# Altium PCB Mach dieu khien tu xa unroute.PcbDoc
Units mm, origin at the board's own origin, x right, y up, seen from the top; angles counter-clockwise.
Board outline 143 x 70 mm, 2 copper layers (Top Layer, Bottom Layer); 72 components, 54 nets, 222 pads, 0 vias.
Unrouted connection lines stored in the file: 167.
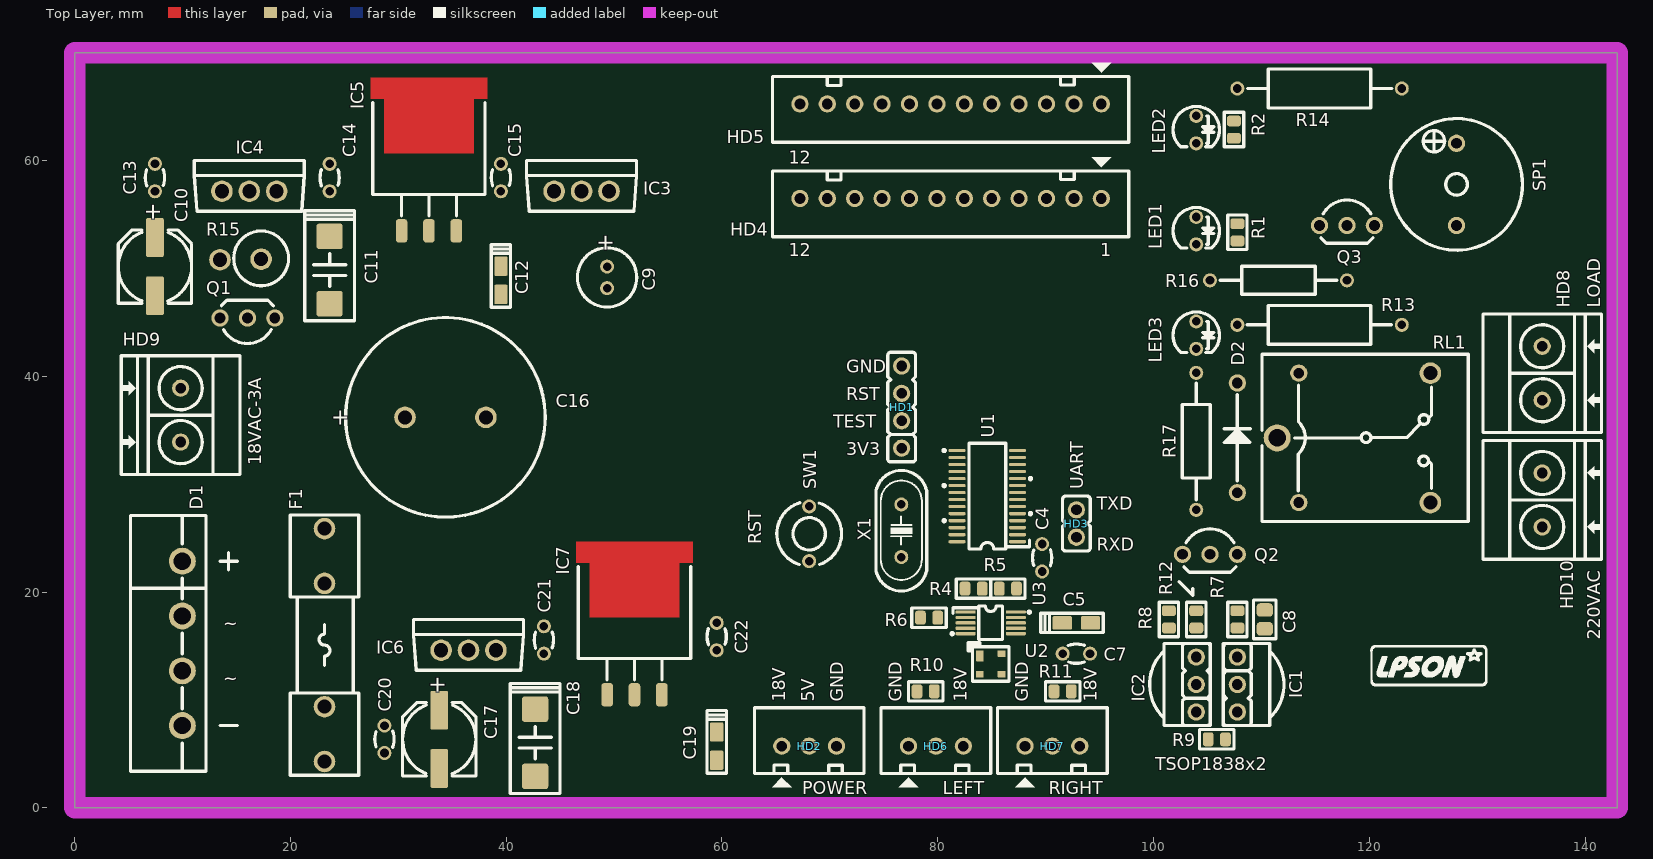
[diagram p0: Top Layer view]
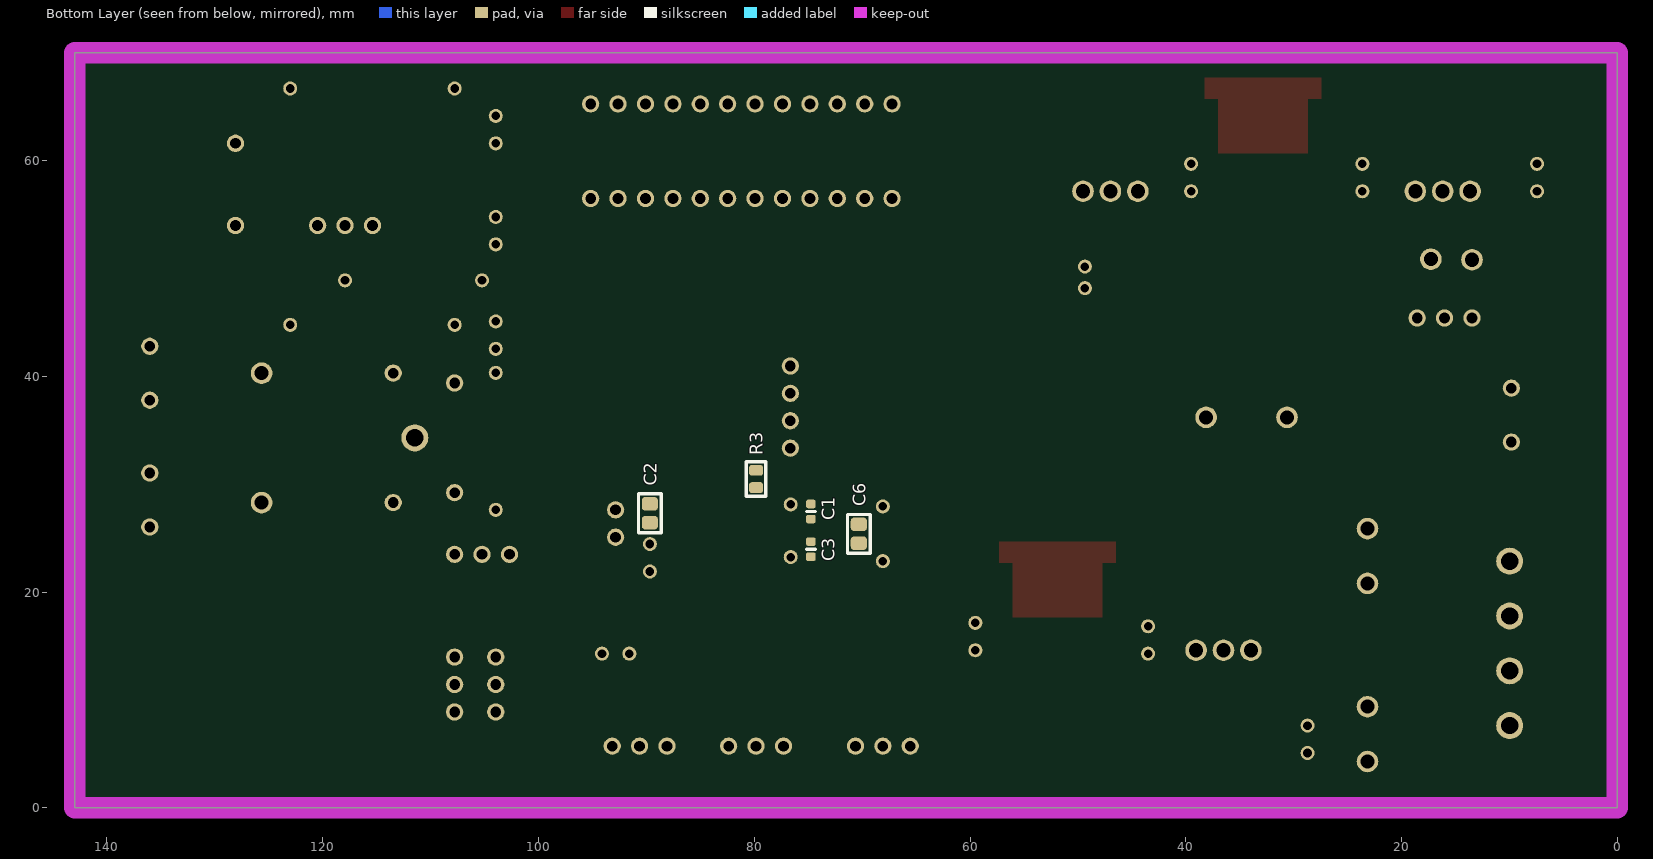
[diagram p1: Bottom Layer view, seen from below]

## Layer stack, top to bottom
Top Solder: solder mask 0.0102, Solder Resist, Dk 3.5
Top Layer: signal copper 0.0356
Dielectric1: dielectric 0.32, FR-4, Dk 4.8
Bottom Layer: signal copper 0.0356
Bottom Solder: solder mask 0.0102, Solder Resist, Dk 3.5

## Board outline
0,0 0,70 143,70 143,0

## Design rules (kind name [scope] priority, off if disabled: settings)
Clearance "Stitching GND" [IsStitchingVia and InNet('GND') vs (IsVia and (Not IsStitchingVia)) Or IsPad] p1: gap=0.5 ignorepadtopadclearanceinfootprint=FALSE except(0: Arc-Hole Track-Hole SMDPad-Hole THPad-Hole Via-Hole Fill-Hole Poly-Hole Region-Hole Text-Hole)
Clearance [All] p2: gap=0.5 ignorepadtopadclearanceinfootprint=FALSE except(0: Arc-Hole Track-Hole SMDPad-Hole THPad-Hole Via-Hole Fill-Hole Poly-Hole Region-Hole Text-Hole)
PlaneConnect [All] p1: planeconnectstyle=Relief reliefexpansion=0.5 reliefentries=4 reliefconductorwidth=0.5 reliefairgap=0.5
PolygonConnect PolygonConnect_1 [isvia] p1: connectstyle=Direct reliefconductorwidth=0.254 reliefentries=4 polygonreliefangle="90 Angle" airgapwidth=0.254
PolygonConnect [All] p2: connectstyle=Relief reliefconductorwidth=1 reliefentries=4 polygonreliefangle="90 Angle" airgapwidth=0.5
RoutingVias [All] p1: holewidth=0.3 width=0.7 viastyle="Through Hole" minholewidth=0.3 minwidth=0.7 maxholewidth=0.6 maxwidth=1.1
SolderMaskExpansion [All] p1: expansion=0.102 istentingtop=FALSE
Width [All] p1: maxlimit=3 minlimit=0.3 preferedwidth=0.5
29 further rules are at their usual default settings.

## Components (designator, comment, footprint, x,y, rotation, side; value= is the part's Value field where it differs from the comment)
C1 "22pF" C0603 74.755,27.464 r90 bottom
C2 "10uF/16V" C0805 89.677,27.305 r90 bottom
C3 "22pF" C0603 74.755,23.971 r270 bottom
C4 "100nF/16V" "Tu gom 104" 89.677,23.178 r90 top
C5 "10uF/16V" CAP_TANTA_10UF_16V 92.852,17.145 r0 top
C6 "1nF" C0805 70.31,25.4 r90 bottom
C7 "100nF/16V" "Tu gom 104" 92.852,14.287 r180 top
C8 "Cap Pol1" C0805 110.315,17.462 r90 top
C9 "10uF/16V" CAP_10UF_16V 49.355,50.165 r270 top
C10 "10uF/50V" C_FC_10UF_50V 7.445,50.165 r270 top
C11 "10uF/35V" CAP_TANTA_10UF_35V 23.637,49.848 r270 top
C12 "10uF/16V" CAP_TANTA_10UF_16V 39.512,48.895 r270 top
C13 "100nF/50V" "Tu gom 104" 7.445,58.42 r270 top
C14 "100nF/25V" "Tu gom 104" 23.637,58.42 r270 top
C15 "100nF/16V" "Tu gom 104" 39.512,58.42 r270 top
C16 "3300uF/50V" CAP_3300UF_50V 30.622,36.195 r0 top
C17 "10uF/50V" C_FC_10UF_50V 33.797,6.35 r270 top
C18 "10uF/35V" CAP_TANTA_10UF_35V 42.687,6.032 r270 top
C19 "10uF/16V" CAP_TANTA_10UF_16V 59.515,5.715 r270 top
C20 "100nF/50V" "Tu gom 104" 28.717,6.35 r90 top
C21 "100nF/25V" "Tu gom 104" 43.498,15.557 r270 top
C22 "100nF/16V" "Tu gom 104" 59.515,15.875 r270 top
D1 "KBU1010" KBU1010G 9.985,15.24 r270 top
D2 "1N4007" 1N4007 107.775,34.29 r90 top
F1 "Fuse/2.5A" FUSE2_5A 23.165,15.085 r90 top
HD1 "SpyBiWire" Header_4 76.66,37.148 r90 top
HD2 "Power" CON3 68.087,5.715 r0 top
HD3 "UART" Header_2 92.852,26.353 r90 top
HD4 "Display Port 1" CON12 81.197,56.487 r180 top
HD5 "Display Port 2" CON12 81.197,65.25 r180 top
HD6 "UM-18 LEFT" CON3 79.835,5.715 r0 top
HD7 "UM-18 RIGHT" CON3 90.63,5.715 r0 top
HD8 "Domino" DOMINO2_GREEN 136.032,37.783 r90 top
HD9 "18VAC-3A" DOMINO2_GREEN 9.83,38.897 r270 top
HD10 "220VAC" DOMINO2_GREEN 136.032,26.035 r90 top
IC1 "TSOP1838" TSOP1838 107.775,11.43 r90 top
IC2 "TSOP1838" TSOP1838 103.965,11.43 r270 top
IC3 "LM7805" LM7805 46.99,57.15 r0 top
IC4 "LM7812" LM7805 16.192,57.15 r0 top
IC5 "LM1086 (3.3V)" LM1086 32.845,53.482 r270 top
IC6 "LM7818" LM7805 36.513,14.605 r0 top
IC7 "LM1086 (3.3V)" LM1086 51.895,10.477 r270 top
LED1 "RED" LED3R 103.965,54.769 r270 top
LED2 "GREEN" LED3R 103.965,64.135 r270 top
LED3 "LED" LED3R 103.965,45.085 r270 top
Q1 "KSA1013" KSA1013 16.017,45.403 r180 top
Q2 "2N2222" 2N2222 105.235,23.495 r0 top
Q3 "2N2222" 2N2222 117.935,53.975 r0 top
R1 "Res2" RESC2012(0805) 107.775,53.34 r270 top
R2 "Res2" RESC2012(0805) 107.457,62.865 r270 top
R3 "Res2" RESC2012(0805) 79.835,30.48 r90 bottom
R4 "Res2" RESC2012(0805) 83.327,20.32 r180 top
R5 "Res2" RESC2012(0805) 86.502,20.32 r0 top
R6 "Res2" RESC2012(0805) 79.2,17.621 r180 top
R7 "Res2" RESC2012(0805) 107.775,17.462 r90 top
R8 "Res2" RESC2012(0805) 101.425,17.462 r270 top
R9 "Res2" RESC2012(0805) 105.87,6.35 r180 top
R10 "Resistor 1/4W" RESC2012(0805) 78.882,10.795 r180 top
R11 "Resistor 1/4W" RESC2012(0805) 91.582,10.795 r0 top
R12 "Res2" RESC2012(0805) 103.965,17.462 r90 top
R13 "Res2" CFR1WS 115.395,44.768 r180 top
R14 "Res2" CFR1WS 115.395,66.675 r0 top
R15 "Res2" R2WD 13.477,50.8 r0 top
R16 "Res2" "RES 1/4W CFR25" 105.235,48.895 r0 top
R17 "Res2" "RES 1/4W CFR25" 103.965,27.623 r90 top
RL1 "Relay 10A/5V" RL_10A_5V 118.57,34.29 r0 top
SP1 "Speaker" SPEAKER 128.095,61.595 r270 top
SW1 "RESET" "BUTTON 2PIN TRON" 68.087,27.94 r270 top
U1 "MSP430G2553" MSP430G2253IPW28R 84.597,28.893 r90 top
U2 "ADS1115" ADS1115 84.915,17.145 r270 top
U3 "PRTR5V0U2X" PRTR5V0U2X 84.915,13.335 r270 top
X1 "12Mhz" CRYSTAL 76.625,25.682 r270 top

## Footprints (in the part's own frame and the unit in brackets; to place one, negate y for a bottom-side part, rotate by r counter-clockwise, add the part's x,y. Pads: shape width x height; smd on the part's side, far side on the other; paste and mask are expansions set on the pad)
1N4007 [mm] "DIODE_DIP"
  round 1.6 hole 1 mask+0.1: 1(-5.08,0) 2(5.08,0)
  silkscreen extent -4,-1.2 4,1.21, body extent -5.8,-1.25 5.8,1.25, height 2.75
2N2222 [mm] "TO-92 Bent Lead, Flat Index; 3 In-Line, Axial Leads; Body Dia. 4.5mm; Leads 0.51 x 0.48 mm (max)"
  round 1.6 hole 1 mask+0.1: 1(-2.54,0) 2(0,0)
  round 1.6 hole 1: 3(2.54,0)
  silkscreen extent -2.41,-1.65 2.41,2.37, body extent -2.79,-1.59 2.79,2.61, height 10
ADS1115 [mm] "MSOP-10, 16-Bit  Analog-to-Digital"
  rrect50% 0.3x1.85 smd mask+0.05: 1(-1,-2.325) 2(-0.5,-2.325) 3(0,-2.325) 4(0.5,-2.325) 5(1,-2.325) 6(1,2.325) 7(0.5,2.325) 8(0,2.325) 9(-0.5,2.325) 10(-1,2.325)
  silkscreen extent -1.55,-3.67 1.55,3.68, body extent -1.5,-2.45 1.5,2.45, height 1.15
"BUTTON 2PIN TRON" [mm] "PIN TO PIN 5.08, W=6MM"
  round 1.3 hole 0.8: 1(0,0) 2(5.08,0)
  silkscreen extent -0.33,-3 5.4,3
C0603 [mm] "Chip Capacitor, Body 1.6x0.8mm, 1608"
  rrect50% 0.8x0.9 smd: 1(-0.7,0) 2(0.7,0)
  silkscreen extent 0,-0.4 0,0.4, body extent -0.8,-0.4 0.8,0.4, height 0.6
C0805 [mm] "Chip Capacitor, 2-Leads, Body 2.0x1.3mm, IPC Medium Density"
  rrect50% 1.25x1.5 smd: 1(-0.875,0) 2(0.875,0)
  silkscreen extent -1.8,-1.05 1.8,1.05, body extent -1,-0.6 1,0.6, height 0.95
C_FC_10UF_50V [mm] "ALUMINUM CAPACITOR 6.8x6.8x5.5mm"
  rrect20% 3.6x1.65 smd mask+0.1: 1(-2.7,0) 2(2.7,0)
  silkscreen extent -3.4,-3.4 3.4,3.4, body extent -3.65,-3.3 3.65,3.3, height 7.7
CAP_10UF_16V [mm] "Capacitor, Electrolytic, Radial; Body 5 x 11 mm (Dia.xH typ); Pin Spacing 2 mm (typ)"
  round 1.3 hole 0.8: 1(0,0) 2(2,0)
  silkscreen extent -1.75,-2.75 3.75,2.75, body extent -1.53,-2.53 3.53,2.53, height 11.53
CAP_3300UF_50V [mm] "Capacitor, Electrolytic, Radial; Body 18 x 35.5 mm (Dia.xH typ); Pin Spacing 7.5 mm (typ)"
  round 2 hole 1.3: 1(0,0) 2(7.5,0)
  silkscreen extent -5.5,-9.25 13,9.25
CAP_TANTA_10UF_16V [mm] "CAP TANTALUM 10UF 16V 10% C1206(3216), Body 3.2x1.6mm"
  rrect20% 1.8x1.23 smd: 1(-1.31,0) 2(1.31,0)
  silkscreen extent -3.3,-0.9 2.5,0.9, body extent -1.6,-0.8 1.6,0.8, height 1
CAP_TANTA_10UF_35V [mm] "CAP TANTALUM 10UF 35V 10% C2917(7343), Body 7.3x4.3mm"
  rrect20% 2.37x2.43 smd: 1(-3.12,0) 2(3.12,0)
  silkscreen extent -5.5,-2.3 4.7,2.3, body extent -3.8,-2.3 3.8,2.3, height 3.1
CFR1WS [mm] "RESISTOR_1W"
  round 1.3 hole 0.8: 1(-7.62,0) 2(7.62,0)
  silkscreen extent -6.68,-1.8 6.7,1.8
CON3 [mm] "CON 3"
  round 1.6 hole 1 mask+0.1: 1(-2.54,0) 2(0,0) 3(2.54,0)
  silkscreen extent -5.08,-3.8 5.08,3.56, body extent -5,-2.29 5,3.41, height 7
CON12 [mm] "CON12"
  round 1.6 hole 1 mask+0.1: 1(-13.97,0) 2(-11.43,0) 3(-8.89,0) 4(-6.35,0) 5(-3.81,0) 6(-1.27,0) 7(1.27,0) 8(3.81,0) 9(6.35,0) 10(8.89,0) 11(11.43,0) 12(13.97,0)
  silkscreen extent -16.51,-3.8 16.51,3.56, body extent -16.3,-2.29 16.3,3.41, height 7
CRYSTAL [mm] "Quartz Crystal, Thru-Hole; 2 Leads; Body 11.35 x 4.65 x 13.46 mm (LxWxH max)"
  round 1.3 hole 0.8 mask+0.1: 1(-2.44,0) 2(2.44,0)
  silkscreen extent -5.59,-2.35 5.59,2.35, body extent -5.49,-2.25 5.49,2.25, height 3.6
DOMINO2_GREEN [mm] "10A PIN TO PIN 5mm 11mmx11mm"
  round 1.6 hole 1 mask+0.1: 1(0,0) 2(5,0)
  silkscreen extent -3,-5.5 8,5.5, body extent -3.14,-4.05 7.62,4.95, height 12.5
FUSE2_5A [mm] "Fuse 2.5A  250V"
  round 2 hole 1.3: 1(-10.795,0) 1(-5.715,0) 2(5.715,0) 2(10.795,0)
  silkscreen extent -12.06,-3.18 12.06,3.18, body extent -11.3,-3.09 11.4,3.1, height 9.6
Header_2 [mm] "Connector DIP, 2Pin_2.54mm"
  round 1.6 hole 1 mask+0.1: 1(-1.27,0) 2(1.27,0)
  silkscreen extent -2.54,-1.28 2.54,1.28, body extent -2.54,-1.27 2.54,1.27, height 10.1
Header_4 [mm] "Connector DIP, 4Pin_2.54mm"
  round 1.6 hole 1 mask+0.1: 1(-3.81,0) 2(-1.27,0) 3(1.27,0) 4(3.81,0)
  silkscreen extent -5.08,-1.28 5.08,1.28, body extent -5.08,-1.27 5.08,1.27, height 10.1
KBU1010G [mm] "KBP206 bridge diode 10A"
  round 2.5 hole 1.6 mask+0.1: 1(-7.62,0) 2(-2.54,0) 3(2.54,0) 4(7.62,0)
  silkscreen extent -11.85,-4.8 11.85,2.2, body extent -11.6,-4.75 11.6,2.2, height 18.65
KSA1013 [mm] "TO-92 Bent Lead, Flat Index; 3 In-Line, Axial Leads; Body Dia. 4.5mm; Leads 0.51 x 0.48 mm (max)"
  round 1.6 hole 1 mask+0.1: 1(-2.54,0) 2(0,0)
  round 1.6 hole 1: 3(2.54,0)
  silkscreen extent -2.41,-1.65 2.41,2.37, body extent -2.79,-1.59 2.79,2.61, height 10
LED3R [mm] "LED 3mm_RED"
  round 1.3 hole 0.8: 1(0,0) 2(2.54,0)
  silkscreen extent -0.88,-2.15 2.87,2.15, body extent -0.73,-2 2.94,2, height 4.6
LM1086 [mm] "TO-263 1.5A Low Dropout Positive Regulators"
  rrect50% 2.16x1.07 smd mask+0.1: 1(0,-2.54) 2(0,0) 3(0,2.54)
  Top Layer region: -14.17,-5.4 -14.17,5.4 -12.26,5.4 -12.26,4.165 -7.18,4.165 -7.18,-4.165 -12.26,-4.165 -12.26,-5.4
  silkscreen extent -11.88,-5.21 -1.4,5.21, body extent -14.52,-5 1.15,5, height 4.78
LM7805 [mm] "POWER IC 7805"
  round 2 hole 1.3: 1(-2.54,0) 2(0,0) 3(2.54,0)
  silkscreen extent -5.1,-1.85 5.1,2.85, body extent -5.56,-1.63 5.65,3.06, height 19.17
MSP430G2253IPW28R [mm] "TSSOP PW 28  PIN TO PIN 0.65"
  oval 0.3x1.6 smd mask+0.1: 1(-4.225,-2.8) 2(-3.575,-2.8) 3(-2.925,-2.8) 4(-2.275,-2.8) 5(-1.625,-2.8) 6(-0.975,-2.8) 7(-0.325,-2.8) 8(0.325,-2.8) 9(0.975,-2.8) 10(1.625,-2.8) 11(2.275,-2.8) 12(2.925,-2.8) 13(3.575,-2.8) 14(4.225,-2.8) 15(4.225,2.8) 16(3.575,2.8) 17(2.925,2.8) 18(2.275,2.8) 19(1.625,2.8) 20(0.975,2.8) 21(0.325,2.8) 22(-0.325,2.8) 23(-0.975,2.8) 24(-1.625,2.8) 25(-2.275,2.8) 26(-2.925,2.8) 27(-3.575,2.8) 28(-4.225,2.8)
  silkscreen extent -4.9,-4.1 4.9,4.1, body extent -4.9,-3.31 4.9,3.31, height 1.2
PRTR5V0U2X [mm] "SOT143B Ultra low capacitance double rail-to-rail ESD protection diode"
  rrect10% 1x0.7 smd mask+0.1: 1(-0.75,-1)
  rrect10% 0.6x0.7 smd mask+0.1: 2(0.95,-1) 3(0.95,1) 4(-0.95,1)
  silkscreen extent -2,-2.1 1.6,1.7
R2WD [mm] "R2W, 2 pin 3.81mm stand"
  round 2 hole 1.3: 1(0,0) 2(3.81,0.051)
  silkscreen extent 1.27,-2.41 6.35,2.66
"RES 1/4W CFR25" [mm] "Axial Device, Thru-Hole; 2 Leads fi 0.55"
  round 1.3 hole 0.8 mask+0.1: 1(0,0) 2(12.7,0)
  silkscreen extent 0.94,-1.3 11.76,1.3, body extent 0.97,-1.16 11.74,1.16, height 2.93
RESC2012(0805) [mm] "Chip Resistor, Body 2.0x1.3mm, 1/8W 0805"
  rrect50% 1x1.3 smd: 1(-0.8,0) 2(0.8,0)
  silkscreen extent -1.6,-0.9 1.6,0.9, body extent -1,-0.62 1,0.63, height 0.6
RL_10A_5V [mm] "Relay SRD-05VDC-SL-C, 5 pin, 10A,19.1X15.5"
  round 2.5 hole 1.6: 1(-7.1,0)
  round 2 hole 1.3: 2(7.1,6) 3(7.1,-6)
  round 1.6 hole 1: 4(-5.1,-6) 5(-5.1,6)
  silkscreen extent -8.5,-7.75 10.6,7.75, body extent -8.5,-7.75 10.6,7.75, height 15.3
SPEAKER [mm] "TMB12A05"
  round 1.6 hole 1 mask+0.1: 1(0,0) 2(7.62,0)
  silkscreen extent -2.29,-6.1 9.91,6.1
TSOP1838 [mm] "Connector DIP, 3Pin_2.54mm"
  round 1.6 hole 1 mask+0.1: 1(2.54,0) 2(0,0) 3(-2.54,0)
  silkscreen extent -3.81,-4.32 3.81,1.3
"Tu gom 104" [mm] "Capacitor, Radial, Tantalum, Non-Polarised; Body 3.05 x 1.78 x 3.43 mm (WxTxH max); Pin Spacing 2.54 mm (typ)"
  round 1.3 hole 0.8: 1(-1.27,0) 2(1.27,0)
  silkscreen extent -0.73,-0.89 0.76,0.89, body extent -2.92,-0.85 2.92,0.85, height 6.42

## Part data
C1 C3: library part CN1, "0805-SMD Capacitor"
C2 C16: library part CP1, "Cap P  0,1uF < 22uF , 16 - 50V"
C4 C6 C7 C13 C14 C15 C20 C21 C22: library part CN2, "Cap np 104 => 105pF"
C5 C11 C12 C18 C19: library part CP1, "Tantalum Capacitor"
C8: "Polarized Capacitor (Radial)"
C9 C10 C17: library part CP1, "Aluminium Capacitor"
D1: "10A glass passivated bridge rectifier"
D2: library part D1A, "Diode 1A"
F1: library part Fuse, "Fuse"
HD1: library part Hed4, "Header 4 (Green)"
HD2 HD6 HD7: library part Hed3, "Header 3 (Green)"
HD3 HD8 HD9 HD10: library part Hed2, "Header 2 (Green)"
HD4 HD5: library part Hed12, "Header 12"
IC3 IC4 IC5 IC6 IC7: library part LM78xx, "Linear Regulator"
LED1 LED2: library part LED, "LED Single colour Green and Red"
LED3: "LED Single colour Green and Red"
Q1: library part A1015, "PNP 600mW, ECB"
Q2 Q3: library part C1815, "TRANS GP SS NPN LP 40V TO92"
R1 R2 R3 R4 R5 R6 R7 R8 R9 R12 R13 R14 R15 R16 R17: "Resistor"
R10 R11: library part Res2
RL1: library part "Relay 1", "Relay SPDT,10A - 12VDC 5 Pin"
SP1: library part SPK, "Speaker Chip"
SW1: library part SW2, "Switch button 2 pin"
U1: "MSP430G2553 (28 pins)"
U2: "Analog to Digital Converter"
U3: "ESD protection diode"
X1: library part XT2, "Crystal For all Crystal 2pin."

## Nets (pads, with @x,y where several pads share a name; then routed paths per layer and width w, separated by ;. In a path a pad name is that pad's centre, name@x,y a point inside that pad or via, vN(x,y) a via of type N, cw(c..) or ccw(c..) an arc to the next point about the centre after c; other vN are vias at no path point)
3.3VA: C5.1 C7.2 C19.1 C22.2 IC7.3 R4.2 R5.2 R6.2 U2.8 U3.4
3V3: C2.1 C4.2 C12.1 C15.2 HD1.1 IC5.3 R3.2 R7.2 R8.2 U1.1
5V: C9.1 HD2.2 IC3.3
12V: C11.1 C14.2 HD4.1 HD5.1 IC4.3 IC5.1 Q1.2 R13.1 R14.1
18V: C18.1 C21.2 HD2.1 HD6.3 HD7.3 IC6.3 IC7.1
26VDC: C16.1 C17.1 C20.2 F1.2 IC3.1 IC6.1 Q1.1 R15.2
AIN0: HD6.2 R10.1 U2.4 U3.2
AIN2: HD7.2 R11.1 U2.6 U3.3
ALERT: R6.1 U1.10 U2.2
BUZZ: R16.1 U1.6
GND: C1.1 C2.2 C3.1 C4.1 C5.2 C6.1 C7.1 C8.2 C9.2 C10.2 C11.2 C12.2 C13.1 C14.1 C15.1 C16.2 C17.2 C18.2 C19.2 C20.1 C21.1 C22.1 D1.4 HD1.4 HD2.3 HD4.12 HD5.12 HD6.1 HD7.1 IC1.2 IC2.2 IC3.2 IC4.2 IC5.2 IC6.2 IC7.2 Q2.1 Q3.1 R1.1 R2.1 R10.2 R11.2 SW1.2 U1.28 U2.1 U2.3 U2.5 U2.7 U3.1
IREMOTE: R8.1 R9.2 R12.2 U1.5
LEDA1: HD4.2 U1.11
LEDA2: HD4.3 U1.12
LEDB1: HD5.2 U1.16
LEDB2: HD5.3 U1.17
NetC8_1: C8.1 IC1.1 IC2.1 R7.1
NetC10_1: C10.1 C13.2 IC4.1 Q1.3 R15.1
NetD1_1: D1.1 F1.1
NetD1_2: D1.2 HD9.1
NetD1_3: D1.3 HD9.2
NetD2_1: D2.1 Q2.3 RL1.4
NetD2_2: D2.2 R13.2 RL1.5
NetHD8_1: HD8.1 HD10.2
NetHD8_2: HD8.2 RL1.1
NetHD10_1: HD10.1 RL1.3
NetIC1_3: IC1.3 R9.1
NetIC2_3: IC2.3 R12.1
NetLED1_2: LED1.2 R1.2
NetLED2_2: LED2.2 R2.2
NetLED3_2: LED3.2 R17.2
NetQ2_2: Q2.2 R17.1
NetQ3_2: Q3.2 R16.2
NetQ3_3: Q3.3 SP1.2
NetR4_1: R4.1 U1.23 U2.9
NetR5_1: R5.1 U1.22 U2.10
NetR14_2: R14.2 SP1.1
P1.5: LED1.1 U1.7
P2.5: LED2.1 U1.18
RELAY: LED3.1 U1.2
RESET: C6.2 HD1.3 R3.1 SW1.1 U1.24
RXD: HD3.1 U1.3
SEG_A: HD4.4 HD5.4 U1.9
SEG_B: HD4.5 HD5.5 U1.8
SEG_C: HD4.6 HD5.6 U1.13
SEG_D: HD4.7 HD5.7 U1.14
SEG_E: HD4.8 HD5.8 U1.15
SEG_F: HD4.9 HD5.9 U1.19
SEG_G: HD4.10 HD5.10 U1.20
SEG_H: HD4.11 HD5.11 U1.21
TEST: HD1.2 U1.25
TXD: HD3.2 U1.4
XIN: C3.2 U1.27 X1.2
XOUT: C1.2 U1.26 X1.1
pads on no net: RL1.2

## Keep-outs
Keep-Out Layer:
  the board outline again, w2

## Silkscreen, mask and mechanical layers (free items; w line width, h text height)
Top Overlay:
  drawing of 897 lines, arcs and shapes, not listed
  text "12" at 66.182,59.69 h1.2
  text "12" at 66.182,51.118 h1.2
  text "1" at 95.075,51.118 h1.2
  text "LOAD" at 141.43,46.355 h1.2 r90
  text "GND" at 71.51,40.323 h1.2
  text "RST" at 71.51,37.783 h1.2
  text "TEST" at 70.31,35.243 h1.2
  text "3V3" at 71.51,32.703 h1.2
  text "18VAC-3A" at 17.287,31.75 h1.2 r90
  text "UART" at 93.487,29.528 h1.2 r90
  text "TXD" at 94.757,27.623 h1.2
  text "RST" at 63.642,24.448 h1.2 r90
  text "RXD" at 94.757,23.813 h1.2
  text "~" at 13.795,16.51 h1.2
  text "220VAC" at 141.43,15.557 h1.2 r90
  text "~" at 13.795,11.43 h1.2
  text "18V" at 65.865,9.842 h1.2 r90
  text "5V" at 68.564,9.842 h1.2 r90
  text "GND" at 71.262,9.842 h1.2 r90
  text "GND" at 76.66,9.842 h1.2 r90
  text "18V" at 82.692,9.842 h1.2 r90
  text "GND" at 88.407,9.842 h1.2 r90
  text "18V" at 94.757,9.842 h1.2 r90
  text "TSOP1838x2" at 100.155,3.492 h1.2
  text "POWER" at 67.452,1.27 h1.2
  text "LEFT" at 80.47,1.27 h1.2
  text "RIGHT" at 90.312,1.27 h1.2

## Dimensions
0,0 to 143,0 on Mechanical 2
0,0 to 0,70 on Mechanical 2

## Text inside footprints (layer, text, board x,y; h text height)
C9: Top Overlay "+" at 48.593,53.229 h1.5 r270; Mechanical 1 "+" at 48.855,51.665 h1 r270; Mechanical 1 "1" at 48.855,50.365 h1 r270; Mechanical 1 "2" at 48.855,48.465 h1 r270
C10: Top Overlay "+" at 6.645,56.065 h1.5 r270; Mechanical 1 "+" at 6.445,53.365 h2 r270
C16: Top Overlay "+" at 23.773,35.495 h1.5; Mechanical 1 "2" at 37.822,35.595 h1.2; Mechanical 1 "1" at 30.422,35.595 h1.2; Mechanical 1 "+" at 26.872,35.495 h1.5
C17: Top Overlay "+" at 32.997,12.25 h1.5 r270; Mechanical 1 "+" at 32.797,9.55 h2 r270
D1: Mechanical 1 "1" at 9.485,22.96 h1 r270; Mechanical 1 "4" at 9.485,7.96 h1 r270; Mechanical 1 "-" at 7.585,7.76 h1 r270; Mechanical 1 "AC" at 7.485,13.46 h1 r270; Mechanical 1 "AC" at 7.485,18.56 h1 r270; Mechanical 1 "+" at 7.585,23.16 h1 r270
HD1: Mechanical 1 "4" at 76.914,40.704 h1.2 r90; Mechanical 1 "1" at 76.914,33.084 h1.2 r90
HD2: Mechanical 1 "3" at 70.287,5.215 h1; Mechanical 1 "1" at 65.387,5.215 h1
HD3: Mechanical 1 "1" at 93.106,24.829 h1.2 r90; Mechanical 1 "2" at 93.106,27.369 h1.2 r90
HD4: Mechanical 1 "1" at 95.296,56.987 h1 r180; Mechanical 1 "12" at 67.997,56.987 h1 r180
HD5: Mechanical 1 "1" at 95.296,65.75 h1 r180; Mechanical 1 "12" at 67.997,65.75 h1 r180
HD6: Mechanical 1 "3" at 82.035,5.215 h1; Mechanical 1 "1" at 77.135,5.215 h1
HD7: Mechanical 1 "3" at 92.83,5.215 h1; Mechanical 1 "1" at 87.93,5.215 h1
IC1: Mechanical 1 "GND" at 111.975,11.93 h1 r180; Mechanical 1 "VCC" at 110.475,12.33 h1 r90; Mechanical 1 "OUT" at 110.475,7.93 h1 r90; Mechanical 1 "3" at 108.029,8.636 h1.2 r90; Mechanical 1 "1" at 108.029,13.716 h1.2 r90
IC2: Mechanical 1 "GND" at 99.765,10.93 h1; Mechanical 1 "VCC" at 101.265,10.53 h1 r270; Mechanical 1 "OUT" at 101.265,14.93 h1 r270; Mechanical 1 "3" at 103.711,14.224 h1.2 r270; Mechanical 1 "1" at 103.711,9.144 h1.2 r270
IC3: Mechanical 1 "O" at 49.149,58.674 h1.2; Mechanical 1 "G" at 46.609,58.674 h1.2; Mechanical 1 "I" at 44.323,58.674 h1.2
IC4: Mechanical 1 "O" at 18.351,58.674 h1.2; Mechanical 1 "G" at 15.811,58.674 h1.2; Mechanical 1 "I" at 13.525,58.674 h1.2
IC5: Mechanical 1 "1" at 30.145,57.157 h1; Mechanical 1 "2" at 32.445,57.157 h1; Mechanical 1 "3" at 35.045,57.057 h1
IC6: Mechanical 1 "O" at 38.672,16.129 h1.2; Mechanical 1 "G" at 36.132,16.129 h1.2; Mechanical 1 "I" at 33.846,16.129 h1.2
IC7: Mechanical 1 "1" at 49.195,14.152 h1; Mechanical 1 "2" at 51.495,14.152 h1; Mechanical 1 "3" at 54.095,14.052 h1
Q1: Mechanical 1 "E" at 18.811,45.784 h0.8 r180; Mechanical 1 "C" at 16.271,45.784 h0.8 r180; Mechanical 1 "B" at 13.731,45.784 h0.8 r180
Q2: Mechanical 1 "C" at 107.635,23.095 h0.8; Mechanical 1 "E" at 102.435,23.095 h0.8; Mechanical 1 "B" at 105.035,23.095 h0.8
Q3: Mechanical 1 "C" at 120.335,53.575 h0.8; Mechanical 1 "E" at 115.135,53.575 h0.8; Mechanical 1 "B" at 117.735,53.575 h0.8
RL1: Mechanical 1 "3" at 125.27,27.59 h1.2; Mechanical 1 "2" at 125.27,39.69 h1.2; Mechanical 1 "4" at 113.07,27.69 h1.2; Mechanical 1 "5" at 113.17,39.79 h1.2; Mechanical 1 "1" at 111.27,33.69 h1.2
SP1: Mechanical 1 "1" at 127.595,61.795 h1.2 r270; Mechanical 1 "2" at 127.495,54.275 h1.2 r270
U1: Mechanical 1 "28" at 83.697,24.392 h1 r90; Mechanical 1 "15" at 83.697,31.892 h1 r90; Mechanical 1 "14" at 86.497,31.992 h1 r90
U2: Mechanical 1 "5" at 83.515,16.345 h0.8 r270; Mechanical 1 "6" at 85.515,16.345 h0.8 r270; Mechanical 1 "10" at 85.515,18.545 h0.8 r270
U3: Mechanical 1 "GND" at 84.215,14.835 h0.5 r270; Mechanical 1 "IO1" at 84.255,12.975 h0.5 r270; Mechanical 1 "IO2" at 85.065,13.085 h0.5 r270; Mechanical 1 "VCC" at 85.055,14.785 h0.5 r270